# EAGLE board BTRelays (EAGLE 6.3)
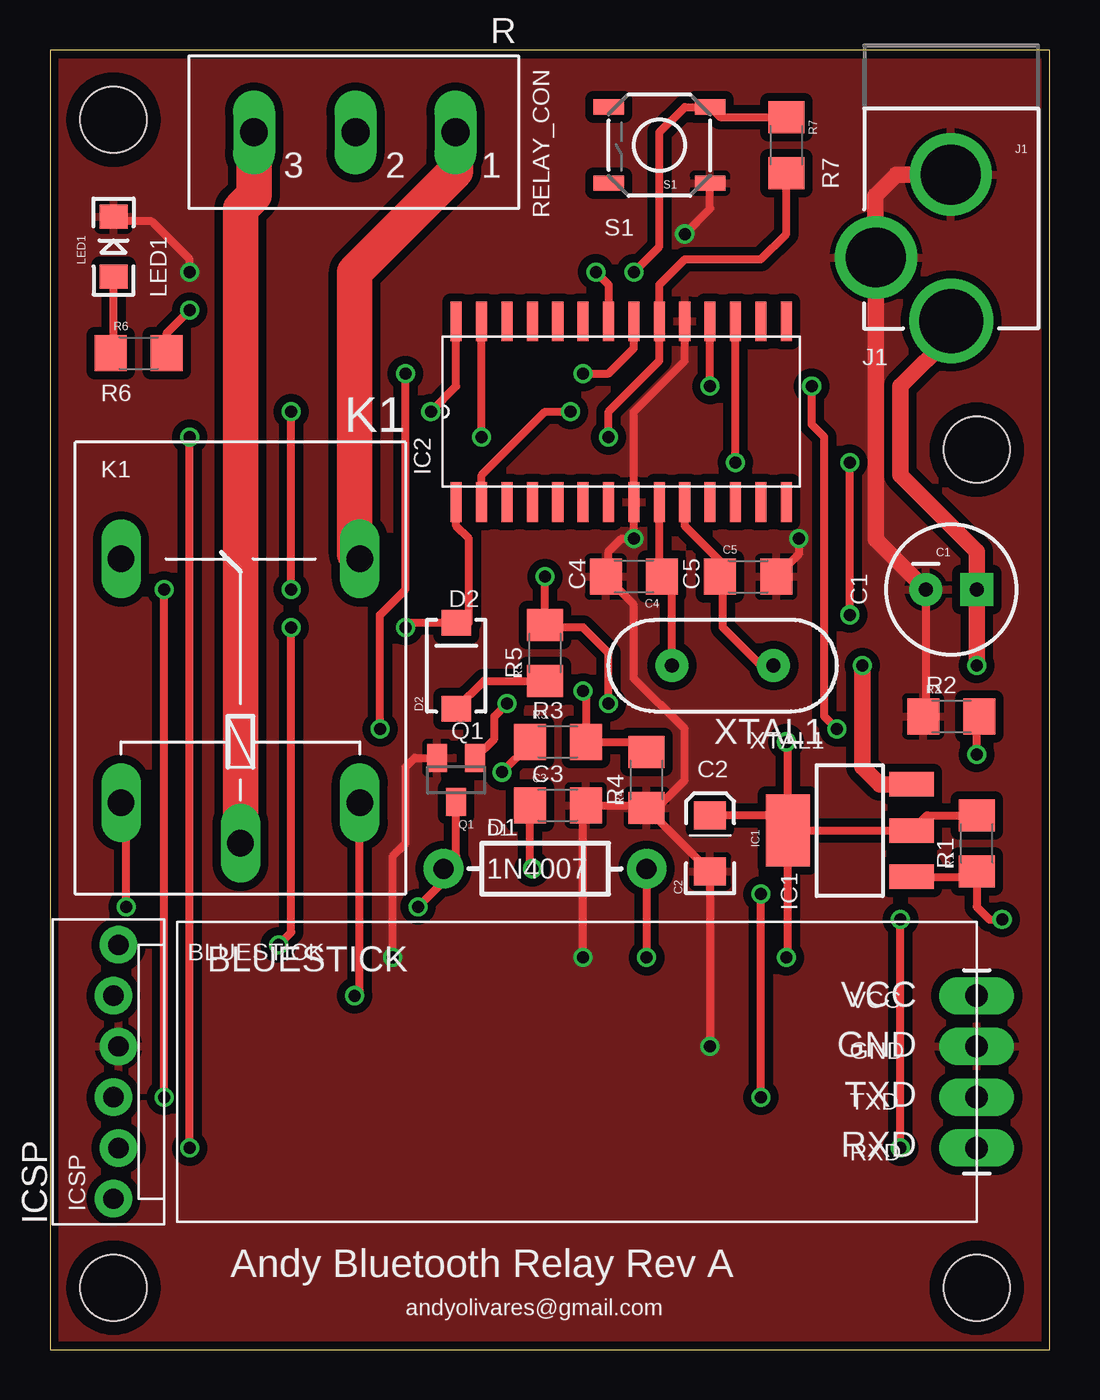
[diagram p0: board, top side]
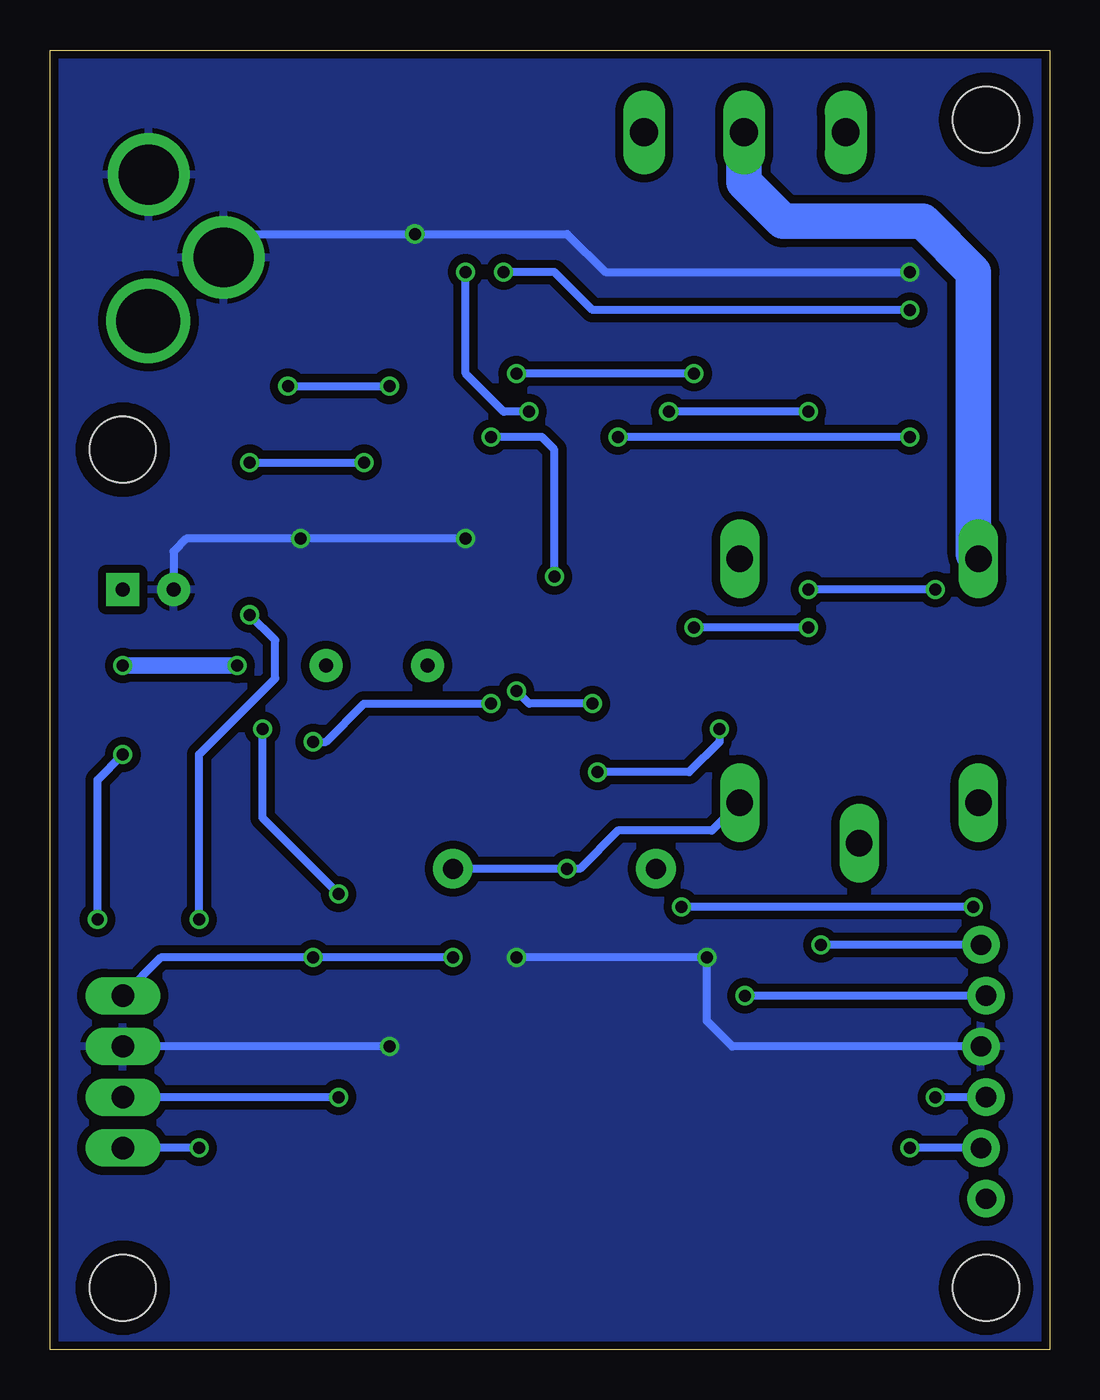
[diagram p1: board, bottom side, seen from below]

Size 50 x 65 mm. Coordinates in mm from the lower left corner, seen from the top.
Outline: 0,0 50,0 50,65 0,65 0,0
Copper layers (1*16): Top 0.0356mm / dielectric 1.5011mm / Bottom 0.0356mm
Design rules "LaenPCBOrder": minimum track width 6mil, minimum drill 13mil, track to track 6mil, track to pad 6mil, pad to pad 6mil, via to via 6mil, smd to smd 6mil, copper to edge 15mil, drill to drill 6mil, minimum pad ring 7mil, minimum via ring 7mil, stop-mask expansion 4mil, vias tented up to drill 0mil, thermal gap 10mil

## Footprints (pad centres in the part's own frame; a part is rotated, then mirrored left to right if it is on the bottom)
BLUESTICK-PTH = drill 1.118 pad 1.88 long: GND 0,1.27; RXD 0,-3.81; TXD 0,-1.27; VCC 0,3.81
CPOL-RADIAL-100UF-25V = drill 0.7 pad 1.651 square: 1 1.27,0 | drill 0.7 pad 1.651: 2 -1.27,0
EIA3216 = smd 1.4 x 1.6: A 1.4,0; C -1.4,0
1206 = smd 1.6 x 1.8: 1 -1.4,0; 2 1.4,0
DIODE-1N4001 = drill 1 pad 1.981: A -5.08,0; C 5.08,0
SMA-DIODE = smd 1.27 x 1.47: A -2.15,0; C 2.15,0
SOT223 = smd 1.219 x 2.235: 1 -2.311,-3.099; 2 0,-3.099; 3 2.311,-3.099 | smd 3.6 x 2.2: 4 0,3.099
SOIC28-W_MC = smd 1.981 x 0.559: 1 -4.521,8.255; 2 -4.521,6.985; 3 -4.521,5.715; 4 -4.521,4.445; 5 -4.521,3.175; 6 -4.521,1.905; 7 -4.521,0.635; 8 -4.521,-0.635; 9 -4.521,-1.905; 10 -4.521,-3.175; 11 -4.521,-4.445; 12 -4.521,-5.715; 13 -4.521,-6.985; 14 -4.521,-8.255; 15 4.521,-8.255; 16 4.521,-6.985; 17 4.521,-5.715; 18 4.521,-4.445; 19 4.521,-3.175; 20 4.521,-1.905; 21 4.521,-0.635; 22 4.521,0.635; 23 4.521,1.905; 24 4.521,3.175; 25 4.521,4.445; 26 4.521,5.715; 27 4.521,6.985; 28 4.521,8.255
MOLEX-1X6_LOCK = drill 1.016 pad 1.88: 1 0,0; 2 2.54,-0.254; 3 5.08,0; 4 7.62,-0.254; 5 10.16,0; 6 12.7,-0.254
POWER_JACK_PTH_LOCK = drill 2.997 pad 4.115: GND 0.025,6.557; GNDBREAK 3.762,10.7 | drill 3.2 pad 4.115: PWR 0,13.878
STAND-OFF = hole 3.302: 0,0
G5LE = drill 1.321 long: 1 -7.493,-5.969; 2 -7.493,5.969; O 4.699,5.969; P -9.525,0; S 4.699,-5.969
LED-1206 = smd 1.2 x 1.4: A -1.5,0; C 1.5,0
SOT23 = smd 1 x 1.4: 1 -0.95,-1.1; 2 0.95,-1.1; 3 0,1.1
MSTBV3 = drill 1.397 long: 1 -2.5,0; 2 2.5,0; 3 7.58,0
TACTILE_SWITCH_SMD = smd 1.524 x 0.762: 1 -2.54,1.905; 2 2.54,1.905; 3 -2.54,-1.905; 4 2.54,-1.905
HC49US = drill 0.7 pad 1.651: 1 -2.54,0; 2 2.54,0

## Placement (x,y rotation side)
BLUESTICK  BLUESTICK  [BLUESTICK-PTH]  46.35,13.89 0 top
C1  100uF  [CPOL-RADIAL-100UF-25V]  45.09,38.02 0 top
C2  10uF  [EIA3216]  33.02,25.32 90 top
C3  100nF  [1206]  25.4,27.23 0 top
C4  22pF  [1206]  29.21,38.66 180 top
C5  22pF  [1206]  34.92,38.66 0 top
D1  1N4007  [DIODE-1N4001]  24.77,24.05 0 top
D2  [SMA-DIODE]  20.32,34.21 90 top
IC1  LD1117  [SOT223]  40.01,25.95 90 top
IC2  PIC18F252-X/SO  [SOIC28-W_MC]  28.57,46.91 90 top
ICSP  [MOLEX-1X6_LOCK]  3.17,7.54 90 top
J1  POWER_JACKPTH_LOCK  [POWER_JACK_PTH_LOCK]  45.09,65.33 180 top
JP1  STAND-OFF  [STAND-OFF]  3.17,61.52 0 top
JP2  STAND-OFF  [STAND-OFF]  3.17,3.09 0 top
JP3  STAND-OFF  [STAND-OFF]  46.35,3.09 0 top
JP4  STAND-OFF  [STAND-OFF]  46.35,45.01 0 top
K1  G5L  [G5LE]  9.53,34.84 90 top
LED1  [LED-1206]  3.17,55.16 90 top
Q1  MMBT2222A  [SOT23]  20.32,28.5 180 top
R  MSTBV3  [MSTBV3]  17.78,60.88 180 top
R1  200  [1206]  46.35,25.32 90 top
R2  600  [1206]  45.09,31.67 0 top
R3  4.7K  [1206]  25.4,30.4 0 top
R4  47K  [1206]  29.84,28.5 90 top
R5  10K  [1206]  24.77,34.84 90 top
R6  220  [1206]  4.45,49.83 0 top
R7  47K  [1206]  36.83,60.24 270 top
S1  [TACTILE_SWITCH_SMD]  30.48,60.24 180 top
XTAL1  20Mhz  [HC49US]  33.66,34.21 180 top

## Library data of the parts
BLUESTICK IC2 R = andy
C1-C5 D1 D2 IC1 ICSP J1 JP1-JP4 LED1 Q1 R1-R7 S1 XTAL1 = SparkFun
K1 = relay

## Nets
5V: BLUESTICK.VCC C2.A C3.1 D1.C IC1.2 IC1.4 IC2.20 ICSP.5 K1.1 R1.2 R5.2 R7.2
BT_RXD: BLUESTICK.RXD IC2.17
BT_TXD: BLUESTICK.TXD IC2.18
BTN1: IC2.2 R7.1 S1.3
GND: BLUESTICK.GND C1.2 C2.C C3.2 C4.2 C5.2 IC2.8 IC2.19 ICSP.4 J1.GND J1.GNDBREAK LED1.C Q1.2 R2.1 R4.1 S1.1
N$1: C1.1 IC1.3 J1.PWR
N$2: IC1.1 R1.1 R2.2
N$3: Q1.1 R3.2 R4.2
N$4: D1.A K1.2 Q1.3
N$5: K1.P R.3
N$6: K1.O R.2
N$7: K1.S R.1
N$8: D2.C IC2.1 ICSP.6
N$9: D2.A R5.1
N$10: LED1.A R6.1
N$11: IC2.22 R6.2
OSC1: C4.1 IC2.9 XTAL1.2
OSC2: C5.1 IC2.10 XTAL1.1
PGC: IC2.27 ICSP.2
PGD: IC2.28 ICSP.3
RELAY1: IC2.21 R3.1

## Tracks (layer width: path | path; a pad name or v marks a point on that pad's centre or on a via)
5V  (via drill 0.6)
  Top 0.406: R1.2 43.87,26.72 IC1.2 IC1.4 | IC1.4 36.14,26.72 C2.A | D1.C v29.84,19.61 | v36.83,19.61 36.91,19.68 IC1.4 | v24.13,24.05 24,24.18 C3.1 | v15.24,17.7 15.49,17.95 K1.1 | v27.94,32.3 27.94,34.84 26.67,36.11 24.89,36.11 R5.2 v24.77,38.66 | v36.83,30.4 36.91,30.32 IC1.4 | v27.94,45.64 27.94,46.91 30.48,49.45 IC2.20 30.48,53.26 31.75,54.53 35.56,54.53 36.83,55.8 R7.2
  Bottom 0.406: v29.84,19.61 v36.83,19.61 44.45,19.61 BLUESTICK.VCC | D1.C v24.13,24.05 23.5,24.05 21.59,25.95 16.89,25.95 K1.1 | ICSP.5 v15.24,17.7 | v27.94,32.3 34.29,32.3 36.2,30.4 v36.83,30.4 | v27.94,45.64 25.4,45.64 24.77,45.01 v24.77,38.66
BT_RXD  (via drill 0.6)
  Top 0.406: v42.55,10.08 v42.55,21.51 | v40.01,36.75 v40.01,44.37 | v34.29,44.37 IC2.17
  Bottom 0.406: v42.55,10.08 BLUESTICK.RXD | v42.55,21.51 42.55,29.77 38.73,33.58 38.73,35.48 v40.01,36.75 | v40.01,44.37 v34.29,44.37
BT_TXD  (via drill 0.6)
  Top 0.406: v35.56,12.62 v35.56,22.78 | v39.37,31.04 38.73,31.67 38.73,45.64 38.1,46.27 v38.1,48.18 | v33.02,48.18 IC2.18
  Bottom 0.406: v35.56,12.62 BLUESTICK.TXD | v35.56,22.78 39.37,26.59 v39.37,31.04 | v38.1,48.18 v33.02,48.18
BTN1  (via drill 0.6)
  Top 0.406: IC2.2 21.59,43.73 24.77,46.91 v26.04,46.91 | v29.21,53.9 30.48,55.16 30.48,60.88 31.75,62.15 S1.3 33.52,61.65 R7.1
  Bottom 0.406: v26.04,46.91 27.3,46.91 29.21,48.81 v29.21,53.9
GND  (via drill 0.6)
  Top 0.406: R2.1 43.81,31.8 C1.2 | v33.02,15.16 C2.C R4.1 | C5.2 37.47,39.8 v37.47,40.56 | R4.1 29.71,27.23 C3.2 26.67,27.09 v26.67,19.61 | IC2.19 31.75,49.45 29.21,46.91 IC2.8 v29.21,40.56 28.57,40.56 27.94,39.92 27.94,38.78 C4.2 29.21,37.26 29.21,33.58 31.75,31.04 31.75,28.5 30.35,27.09 R4.1 | v17.14,19.61 17.14,24.68 17.78,25.32 17.78,29.13 18.25,29.59 Q1.2 | LED1.C 3.4,56.44 5.08,56.44 6.99,54.53 v6.99,53.9 | S1.1 33.02,57.07 v31.75,55.8
  Top 0.813: J1.GND 42.34,58.77 41.27,57.7 41.27,54.67 J1.GNDBREAK 41.32,40.51 C1.2
  Bottom 0.406: v33.02,15.16 BLUESTICK.GND | C1.2 43.81,39.92 43.18,40.56 v37.47,40.56 v29.21,40.56 | v26.67,19.61 v17.14,19.61 17.14,16.43 15.88,15.16 ICSP.4 | v6.99,53.9 22.23,53.9 24.13,55.8 v31.75,55.8 40.15,55.8 J1.GNDBREAK
  pour Bottom (isolate 0.406): 0,65 50,65 50,0 0,0
  pour Top (isolate 0.406): 0,65 50,65 50,0 0,0
N$1  (via drill 0.6)
  Top 0.813: v46.35,34.21 C1.1 46.35,39.92 42.55,43.73 42.55,48.18 45.09,50.72 J1.PWR | v40.64,34.21 40.64,29.13 41.5,28.27 IC1.3
  Bottom 0.813: v40.64,34.21 v46.35,34.21
N$2  (via drill 0.6)
  Top 0.406: R2.2 46.35,31.54 v46.35,29.77 | v47.62,21.51 46.99,21.51 46.35,22.14 R1.1 46.08,23.64 IC1.1
  Bottom 0.406: v46.35,29.77 47.62,28.5 v47.62,21.51
N$3  (via drill 0.6)
  Top 0.406: R4.2 29.34,30.4 R3.2 26.8,32.81 v26.67,32.94 | Q1.1 22.23,30.55 22.23,31.67 v22.86,32.3
  Bottom 0.406: v22.86,32.3 26.04,32.3 v26.67,32.94
N$4  (via drill 0.6)
  Top 0.406: K1.2 3.81,27.1 v3.81,22.14 | v18.41,22.14 19.68,23.41 D1.A 20.32,24.68 Q1.3
  Bottom 0.406: v3.81,22.14 v18.41,22.14
N$5
  Top 1.778: K1.P 9.53,57.07 10.2,57.74 R.3
N$6
  Bottom 1.778: K1.O 3.81,39.8 3.81,53.9 6.35,56.44 13.34,56.44 15.28,58.38 R.2
N$7
  Top 1.778: K1.S 15.24,39.8 15.24,53.9 20.28,58.94 R.1
N$8  (via drill 0.6)
  Top 0.406: v11.43,20.24 12.06,20.88 v12.06,36.11 | v17.78,36.11 18.02,36.36 D2.C 20.95,36.36 20.95,40.56 20.32,41.2 IC2.1
  Bottom 0.406: ICSP.6 v11.43,20.24 | v12.06,36.11 v17.78,36.11
N$9
  Top 0.406: D2.A 21.7,33.45 R5.1
N$10
  Top 0.406: R6.1 3.17,49.96 LED1.A
N$11  (via drill 0.6)
  Top 0.406: IC2.22 27.94,53.26 v27.3,53.9 | v6.99,51.99 5.84,50.85 R6.2
  Bottom 0.406: v27.3,53.9 24.77,53.9 22.86,51.99 v6.99,51.99
OSC1
  Top 0.406: IC2.9 30.48,38.66 C4.1 31.11,38.15 XTAL1.2
OSC2
  Top 0.406: IC2.10 31.75,41.2 33.52,39.42 C5.1 33.66,38.52 33.66,36.11 35.56,34.21 XTAL1.1
PGC  (via drill 0.6)
  Top 0.406: v21.59,45.64 IC2.27 | v6.99,10.08 v6.99,45.64
  Bottom 0.406: v6.99,45.64 v21.59,45.64 | ICSP.2 v6.99,10.08
PGD  (via drill 0.6)
  Top 0.406: v5.71,12.62 v5.71,38.02 | v12.06,38.02 v12.06,46.91 | v19.05,46.91 20.32,48.18 IC2.28
  Bottom 0.406: v5.71,38.02 v12.06,38.02 | ICSP.3 v5.71,12.62 | v12.06,46.91 v19.05,46.91
RELAY1  (via drill 0.6)
  Top 0.406: v16.51,31.04 16.51,36.75 17.78,38.02 v17.78,48.81 | v26.67,48.81 27.94,48.81 29.21,50.09 IC2.21 | R3.1 24,30.27 v22.61,28.88
  Bottom 0.406: v22.61,28.88 18.03,28.88 16.51,30.4 v16.51,31.04 | v17.78,48.81 v26.67,48.81

## Text on the board
_tNames: RELAY_CON | R7 | S1 | LED1 | J1 | R6 | K1 | IC2 | C4 | C5 | D2 | C1 | R5 | R2 | R3 | Q1 | XTAL1 | C2 | C3 | R4 | D1 | R1 | IC1 | BLUESTICK | VCC | GND | TXD | RXD | ICSP | Andy Bluetooth Relay Rev A | andyolivares@gmail.com
_tValues: BLUESTICK